# Altium PCB Power_Board_DRV8323.PcbDoc
Units mil, origin at the board's own origin, x right, y up, seen from the top; angles counter-clockwise.
Board outline 2748.03 x 2216.54 mil, 2 copper layers (Top Layer, Bottom Layer); 86 components, 59 nets, 316 pads, 0 vias.
Unrouted connection lines stored in the file: 118.
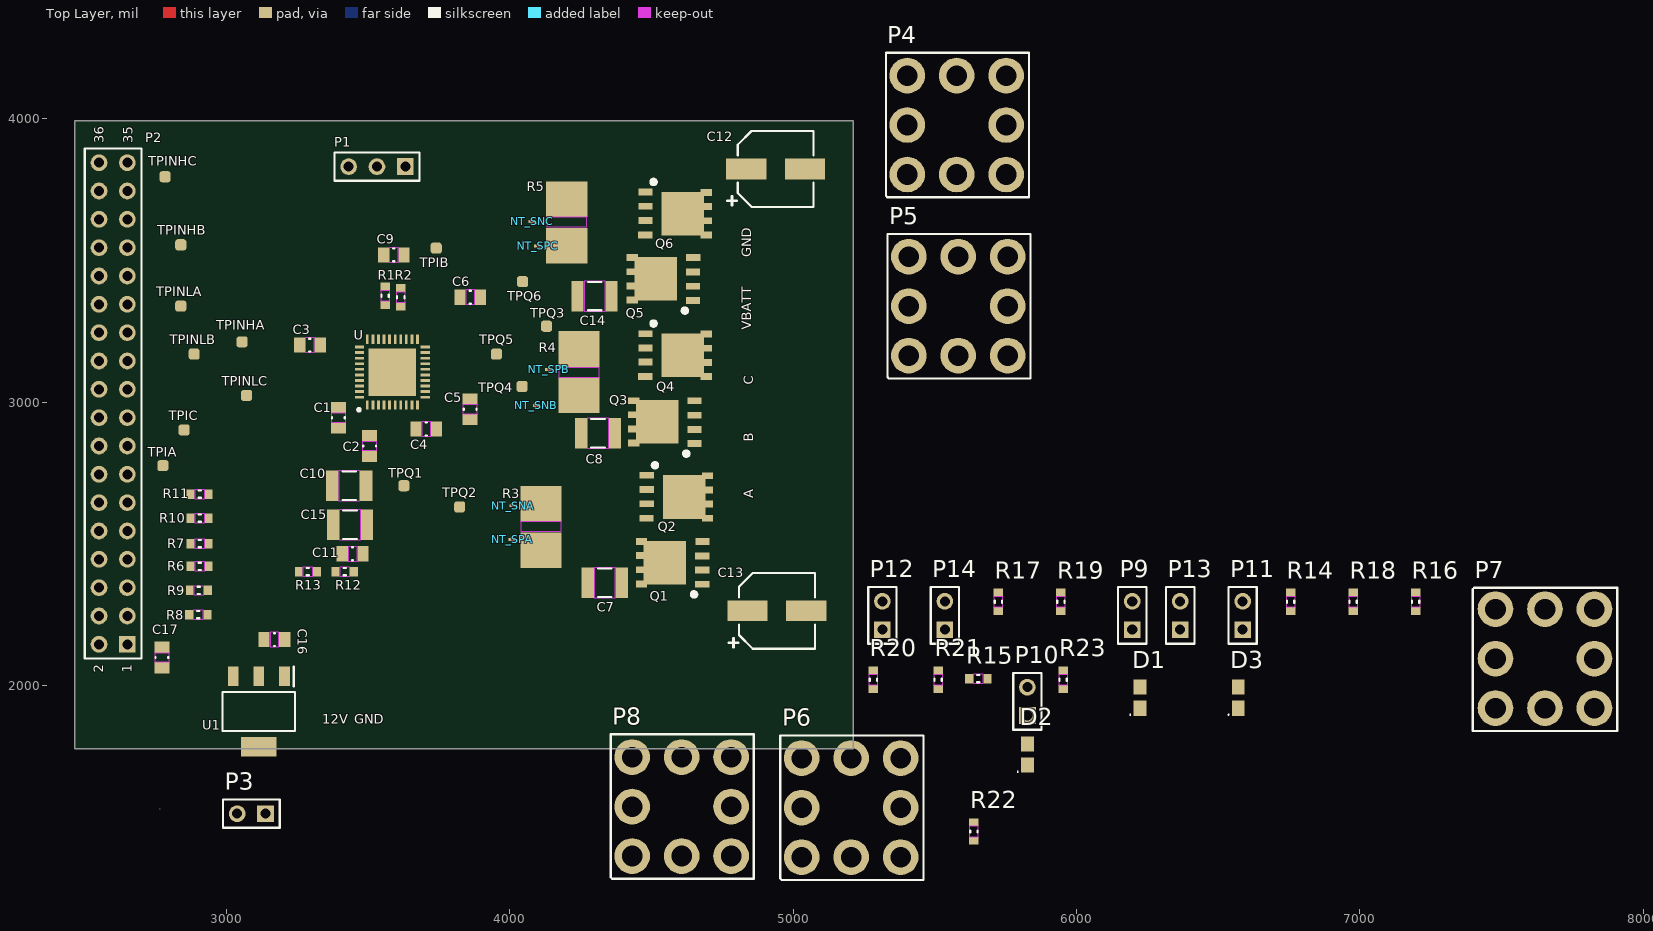
[diagram p0: Top Layer view]
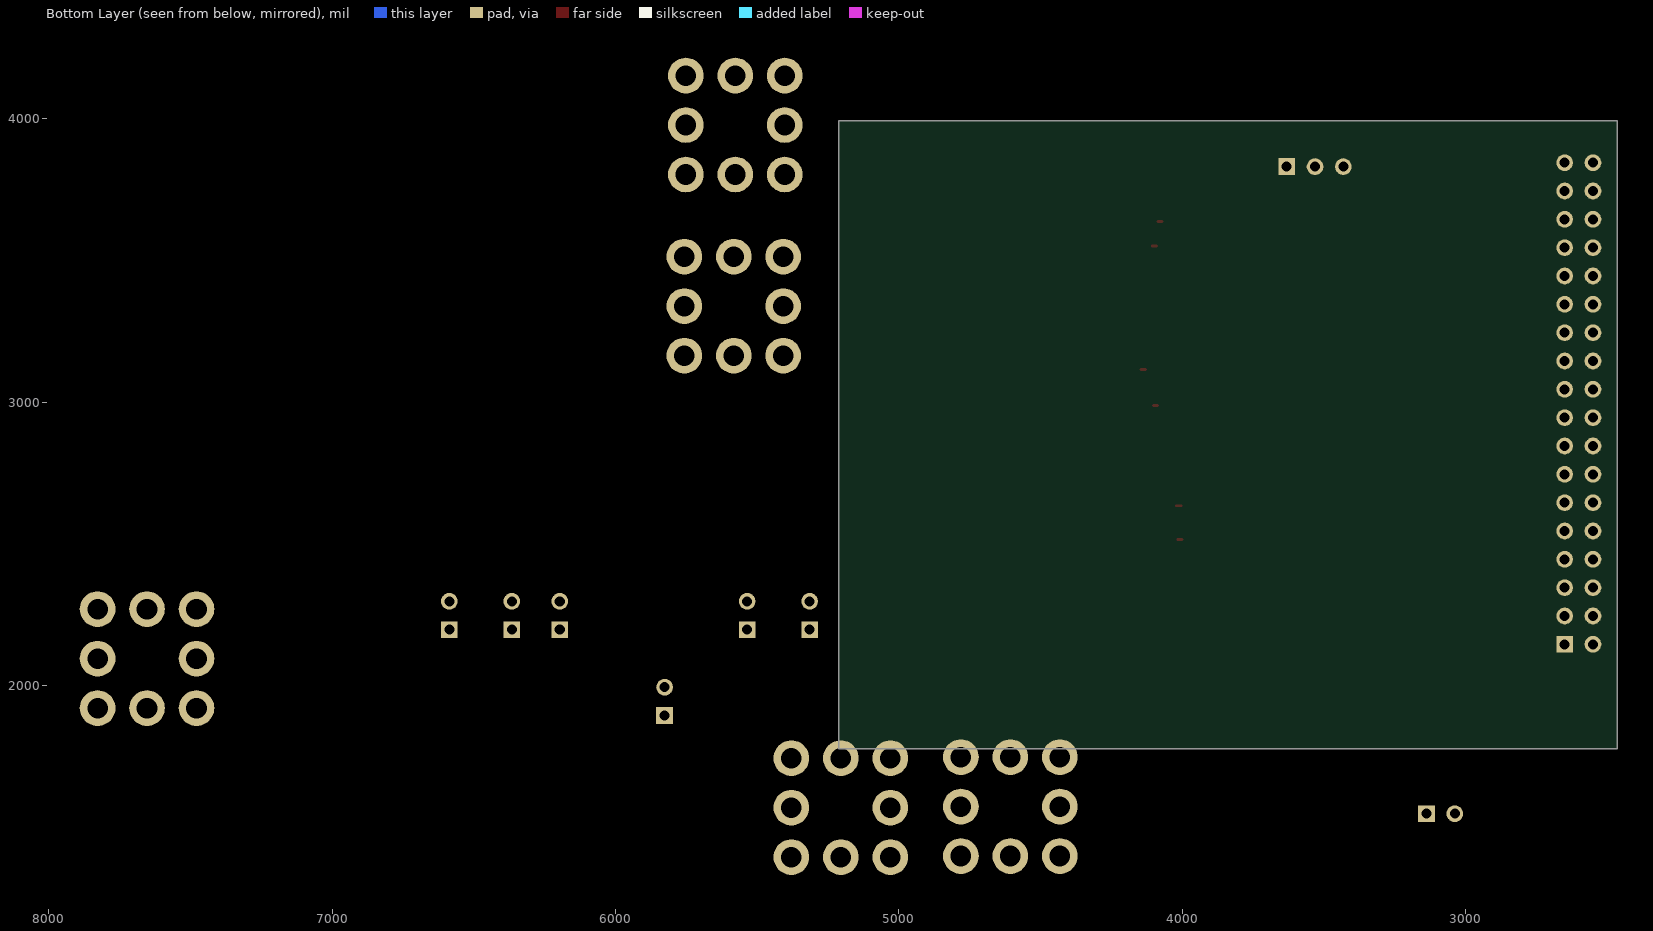
[diagram p1: Bottom Layer view, seen from below]

## Layer stack, top to bottom
Top Solder: solder mask 0.4, Solder Resist, Dk 3.5
Top Layer: signal copper 1.4
Dielectric 1: dielectric 12.6, FR-4, Dk 4.8
Bottom Layer: signal copper 1.4
Bottom Solder: solder mask 0.4, Solder Resist, Dk 3.5

## Board outline
2464.57,1775.59 2464.57,3992.13 5212.6,3992.13 5212.6,1775.59

## Design rules (kind name [scope] priority, off if disabled: settings)
Clearance [All] p1: gap=10 ignorepadtopadclearanceinfootprint=FALSE except(0: Arc-Hole Track-Hole SMDPad-Hole THPad-Hole Via-Hole Fill-Hole Poly-Hole Region-Hole Text-Hole; 5: Arc-Arc Arc-Track Track-Track SMDPad-SMDPad; 7.87: Arc-SMDPad Track-SMDPad SMDPad-Fill SMDPad-Poly SMDPad-Region)
PolygonConnect PolygonConnect_12 [All vs IsNamedPolygon('GND_L01_P197')] p1: connectstyle=Direct reliefconductorwidth=10 reliefentries=4 polygonreliefangle="90 Angle" airgapwidth=10
PolygonConnect PolygonConnect_11 [All vs IsNamedPolygon('GND_L02_P186')] p2: connectstyle=Direct reliefconductorwidth=10 reliefentries=4 polygonreliefangle="90 Angle" airgapwidth=10
PolygonConnect PolygonConnect_10 [All vs IsNamedPolygon('Bottom Layer-GND')] p3: connectstyle=Direct reliefconductorwidth=10 reliefentries=4 polygonreliefangle="90 Angle" airgapwidth=10
PolygonConnect PolygonConnect_9 [All vs IsNamedPolygon('VBATT_L02_P184')] p4: connectstyle=Direct reliefconductorwidth=10 reliefentries=4 polygonreliefangle="90 Angle" airgapwidth=10
PolygonConnect PolygonConnect_8 [All vs IsNamedPolygon('GND_L02_P183')] p5: connectstyle=Direct reliefconductorwidth=10 reliefentries=4 polygonreliefangle="90 Angle" airgapwidth=10
PolygonConnect PolygonConnect_7 [All vs IsNamedPolygon('GND_L01_P180')] p6: connectstyle=Direct reliefconductorwidth=10 reliefentries=4 polygonreliefangle="90 Angle" airgapwidth=10
PolygonConnect PolygonConnect_6 [All vs IsNamedPolygon('GND_L02_P181')] p7: connectstyle=Direct reliefconductorwidth=10 reliefentries=4 polygonreliefangle="90 Angle" airgapwidth=10
PolygonConnect PolygonConnect_5 [All vs IsNamedPolygon('NETNT_SPA_2_L02_P179')] p8: connectstyle=Direct reliefconductorwidth=10 reliefentries=4 polygonreliefangle="90 Angle" airgapwidth=10
PolygonConnect PolygonConnect_4 [All vs IsNamedPolygon('GND_L02_P177')] p9: connectstyle=Direct reliefconductorwidth=10 reliefentries=4 polygonreliefangle="90 Angle" airgapwidth=10
PolygonConnect PolygonConnect_3 [All vs IsNamedPolygon('NETNT_SPA_2_L01_P178')] p10: connectstyle=Direct reliefconductorwidth=10 reliefentries=4 polygonreliefangle="90 Angle" airgapwidth=10
PolygonConnect PolygonConnect_2 [All vs IsNamedPolygon('VBATT_L01_P178')] p11: connectstyle=Direct reliefconductorwidth=10 reliefentries=4 polygonreliefangle="90 Angle" airgapwidth=10
PolygonConnect PolygonConnect_1 [All vs IsNamedPolygon('3V3_L01_P174') Or IsNamedPolygon('GND_L01_P151') Or IsNamedPolygon('GND_L01_P155') Or IsNamedPolygon('GND_L01_P159') Or IsNamedPolygon('GND_L01_P163') Or IsNamedPolygon('GND_L01_P173') Or IsNamedPolygon('NETNT_SPA_2_L01_P156') Or IsNamedPolygon('NETNT_SPB_2_L01_P152') Or IsNamedPolygon('NETNT_SPC_2_L01_P148') Or IsNamedPolygon('PHASE_A_L01_P157') Or IsNamedPolygon('PHASE_B_L01_P153') Or IsNamedPolygon('PHASE_C_L01_P149') Or IsNamedPolygon('SPB_L01_P113') Or IsNamedPolygon('Top Layer-GND') Or IsNamedPolygon('Top Layer-GND 1') Or IsNamedPolygon('Top Layer-VBATT') Or IsNamedPolygon('Top Layer-VBATT 1') Or IsNamedPolygon('VBATT_L01_P150') Or IsNamedPolygon('VBATT_L01_P154') Or IsNamedPolygon('VBATT_L01_P162') Or IsNamedPolygon('VBATT_L01_P172') Or IsNamedPolygon('GND_L02_P177') Or IsNamedPolygon('VBATT_L02_P176')] p12: connectstyle=Direct reliefconductorwidth=10 reliefentries=4 polygonreliefangle="90 Angle" airgapwidth=10
PolygonConnect [All] p13: connectstyle=Relief reliefconductorwidth=10 reliefentries=4 polygonreliefangle="90 Angle" airgapwidth=10
RoutingVias [All] p1: holewidth=19.68 width=39.37 viastyle="Through Hole" minholewidth=7.87 minwidth=23.62 maxholewidth=28 maxwidth=50
SilkToSolderMaskClearance [IsPad] p1: minsilkscreentomaskgap=5.91 clearancetoexposedcopper=TRUE
SolderMaskExpansion [All] p1: expansion=4 istentingtop=FALSE
Width [All] p1: maxlimit=15 minlimit=10 preferedwidth=15 toplayer_prefwidth=10 minimp=50.000000 maximp=50.000000 favimp=50.000000
29 further rules are at their usual default settings.

## Classes and differential pairs
component class Power_Board_Components: C7 C8 C9 C10 C11 C12 C13 C14 C15 D1 D2 D3 P1 P3 P4 P5 P6 P7 P8 P9 P10 P11 P12 P13 P14 R14 R15 R16 R17 R18 R19 R20 R21 R22 R23
component class Power_Board_DRV8323: C1 C2 C3 C4 C5 C6 C16 C17 NT_SNA NT_SNB NT_SNC NT_SPA NT_SPB NT_SPC P2 Q1 Q2 Q3 Q4 Q5 Q6 R1 R2 R3 R4 R5 R6 R7 R8 R9 R10 R11 R12 R13 TPIA TPIB TPIC TPINHA TPINHB TPINHC TPINLA TPINLB TPINLC TPQ1 TPQ2 TPQ3 TPQ4 TPQ5 TPQ6 U U1

## Components (designator, comment, footprint, x,y, rotation, side; value= is the part's Value field where it differs from the comment)
C1 "Capacitor - Nonpolarized" "0805 - CAPACITOR"#1 3395,2945 r90 top value=47nF
C2 "Capacitor - Nonpolarized" "0805 - CAPACITOR"#1 3505,2845 r270 top value=1uF
C3 "Capacitor - Nonpolarized" "0805 - CAPACITOR"#1 3294.29,3200.79 r0 top value=1uF
C4 "Capacitor - Nonpolarized" "0805 - CAPACITOR"#1 3705,2905 r180 top value=1nF
C5 "Capacitor - Nonpolarized" "0805 - CAPACITOR"#1 3860,2975 r90 top value=1nF
C6 "Capacitor - Nonpolarized" "0805 - CAPACITOR"#1 3860,3370 r0 top value=1nF
C7 "Capacitor - Nonpolarized" "1210 - Capacitor"#1 4334.65,2362.2 r180 top value=4.7uF
C8 "Capacitor - Nonpolarized" "1210 - Capacitor"#2 4311.02,2889.76 r180 top value=4.7uF
C9 "Capacitor - Nonpolarized" "0805 - CAPACITOR"#1 3590.55,3519.68 r180 top value=0.1uF
C10 "Capacitor - Nonpolarized" "1210 - Capacitor"#1 3433.07,2704.72 r0 top value=4.7uF
C11 "Capacitor - Nonpolarized" "0805 - CAPACITOR"#2 3444.88,2464.57 r0 top value=0.1uF
C12 "Capacitor - Polarized" "OCVZ0606 - CAPACITOR" 4937.99,3822.83 r0 top value=330uF
C13 "Capacitor - Polarized" "OCVZ0606 - CAPACITOR" 4942.82,2262.85 r0 top value=330uF
C14 "Capacitor - Nonpolarized" "1210 - Capacitor"#1 4299.21,3374.02 r180 top value=4.7uF
C15 "Capacitor - Nonpolarized" "1210 - Capacitor"#1 3436.02,2566.93 r180 top value=4.7uF
C16 "Capacitor - Nonpolarized" "0805 - Capacitor" 3169.29,2161.42 r0 top value=1uF
C17 "Capacitor - Nonpolarized" "0805 - Capacitor" 2771.65,2098.43 r90 top value=1uF
D1 "Diode" "0805 - DIODE" 6224.4,1956.69 r90 top value=2.2V
D2 "Diode" "0805 - DIODE" 5826.77,1755.91 r90 top value=3.3V
D3 "Diode" "0805 - DIODE" 6570.85,1956.69 r90 top value=3.3V
NT_SNA "NetTie" "Net Tie" 4004.68,2633.86 r90 top net-tie
NT_SNB "NetTie" "NET TIE" 4086.61,2988.19 r90 top net-tie
NT_SNC "NetTie" "NET TIE" 4070.87,3637.8 r90 top net-tie
NT_SPA "NetTie" "NET TIE" 4000.72,2515.03 r90 top net-tie
NT_SPB "NetTie" "Net Tie" 4130,3115 r90 top net-tie
NT_SPC "NetTie" "Net Tie" 4090.55,3551.18 r90 top net-tie
P1 "1x3 Header" HDR1X3 3631.06,3831.06 r180 top
P2 "Header 18X2" HDR2X18 2650,2145 r90 top
P3 "1x2 Header" HDR1X2 3137.8,1547.24 r180 top
P4 "74650094R" 74650094R 5577.36,3977.76 r90 top
P5 "74650094R" 74650094R 5582.68,3338.58 r90 top
P6 "74650094R" 74650094R 5204.72,1568.31 r90 top
P7 "74650094R" 74650094R 7653.53,2094.48 r0 top
P8 "74650094R" 74650094R 4606.3,1572.24 r90 top
P9 "NTC Thermisters" HDR1X2 6196.84,2196.85 r90 top
P10 "NTC Thermisters" HDR1X2 5826.76,1893.7 r90 top
P11 "NTC Thermisters" HDR1X2 6586.6,2196.85 r90 top
P12 "NTC Thermisters" HDR1X2 5314.95,2196.85 r90 top
P13 "NTC Thermisters" HDR1X2 6366.13,2196.85 r90 top
P14 "NTC Thermisters" HDR1X2 5535.42,2196.85 r90 top
Q1 "MOSFET-N" "POWERPAK® SO-8" 4679.72,2508.27 r180 top
Q2 "MOSFET-N" "POWERPAK® SO-8" 4482.72,2590 r0 top
Q3 "MOSFET-N" "POWERPAK® SO-8" 4652.28,3005 r180 top
Q4 "MOSFET-N" "POWERPAK® SO-8" 4477.72,3090 r0 top
Q5 "MOSFET-N" "POWERPAK® SO-8" 4647.28,3510 r180 top
Q6 "MOSFET-N" "POWERPAK® SO-8" 4477.72,3590 r0 top
R1 "Resistor" "0603 - RESISTOR" 3560,3375 r90 top value=4.7k
R2 "Resistor" "0603 - RESISTOR" 3615,3370 r90 top value=4.7k
R3 "Resistor" "2512 - RESISTOR" 4110.24,2559.06 r270 top value=1m
R4 "Resistor" "2512 - RESISTOR" 4244.09,3105.31 r90 top value=1m
R5 "Resistor" "2512 - RESISTOR" 4200.79,3633.86 r270 top value=1m
R6 "Resistor" "0603 - RESISTOR" 2905,2420 r180 top value=91k
R7 "Resistor" "0603 - RESISTOR" 2905,2500 r0 top value=5.6k
R8 "Resistor" "0603 - RESISTOR" 2900,2250 r180 top value=91k
R9 "Resistor" "0603 - RESISTOR" 2902.52,2335 r0 top value=5.6k
R10 "Resistor" "0603 - RESISTOR" 2905,2590 r180 top value=91k
R11 "Resistor" "0603 - RESISTOR" 2905,2675 r0 top value=5.6k
R12 "Resistor" "0603 - RESISTOR" 3417.32,2401.57 r180 top value=91k
R13 "Resistor" "0603 - RESISTOR" 3287.4,2401.57 r180 top value=5.6k
R14 "Resistor" "0603 - Resistor" 6755.89,2295.27 r90 top value=10k
R15 "Resistor" "0603 - Resistor" 5653.53,2023.62 r0 top value=10k
R16 "Resistor" "0603 - Resistor" 7196.84,2295.27 r90 top value=10k
R17 "Resistor" "0603 - Resistor" 5724.4,2295.27 r90 top value=10k
R18 "Resistor" "0603 - Resistor" 6976.36,2295.27 r90 top value=10k
R19 "Resistor" "0603 - Resistor" 5944.87,2295.27 r90 top value=10k
R20 "Resistor" "0603 - Resistor" 5283.45,2019.68 r90 top
R21 "Resistor" "0603 - Resistor" 5511.8,2019.68 r90 top value=1k
R22 "Resistor" "0603 - Resistor" 5637.8,1484.25 r90 top value=1k
R23 "Resistor" "0603 - Resistor" 5952.74,2019.68 r90 top value=1k
TPIA "Test Point" "Test Point"#1 2775.59,2775.59 r90 top
TPIB "Test Point" "Test Point"#1 3740.16,3543.31 r90 top
TPIC "Test Point" "Test Point"#1 2850.39,2901.57 r90 top
TPINHA "Test Point" "Test Point"#1 3055.12,3212.6 r90 top
TPINHB "Test Point" "Test Point"#1 2838.58,3555.12 r90 top
TPINHC "Test Point" "Test Point"#2 2783.46,3809.72 r90 top
TPINLA "Test Point" "Test Point"#1 2838.58,3338.58 r90 top
TPINLB "Test Point" "Test Point"#1 2885.83,3169.29 r90 top
TPINLC "Test Point" "Test Point"#1 3070.87,3023.62 r90 top
TPQ1 "Test Point" "Test Point"#1 3625.98,2704.72 r90 top
TPQ2 "Test Point" "Test Point"#1 3822.83,2629.92 r90 top
TPQ3 "Test Point" "Test Point"#1 4129.92,3267.72 r90 top
TPQ4 "Test Point" "Test Point"#1 4043.31,3055.12 r90 top
TPQ5 "Test Point" "Test Point"#1 3952.76,3169.29 r90 top
TPQ6 "Test Point" "Test Point"#1 4045,3425 r90 top
U "DRV8323SRTAT" DRV8323SRTAT 3585.55,3105.79 r90 top
U1 "MCP1755ST" TLV1117 3114.17,1907.48 r270 top

## Footprints (in the part's own frame and the unit in brackets; to place one, negate y for a bottom-side part, rotate by r counter-clockwise, add the part's x,y. Pads: shape width x height; smd on the part's side, far side on the other; paste and mask are expansions set on the pad)
"0603 - RESISTOR" [mm] "0603 Chip Resistor - IPC Medium Density"
  rect 0.7x0.85 smd: 1(-0.825,0) 2(0.825,0)
  Top Layer keep-out region: -0.45,0.4 -0.45,-0.4 0.45,-0.4 0.45,0.4
  silkscreen extent -0.1,-0.33 0.1,0.33, body extent -0.8,-0.4 0.8,0.4, height 0.45
"0603 - Resistor" [mm] "0603 Chip Resistor - IPC Medium Density"
  rect 0.7x0.85 smd: 1(-0.825,0) 2(0.825,0)
  Top Layer keep-out region: -0.45,0.4 -0.45,-0.4 0.45,-0.4 0.45,0.4
  silkscreen extent -0.1,-0.33 0.1,0.33, body extent -0.8,-0.4 0.8,0.4, height 0.45
"0805 - CAPACITOR"#1 [mm] "0805 Chip Capacitor - IPC Medium Density"
  rect 1x1.35 smd: 1(-0.925,0) 2(0.925,0)
  Top Layer keep-out region: -0.4,0.65 -0.4,-0.65 0.4,-0.65 0.4,0.65
  silkscreen extent -0.05,-0.58 0.05,0.58, body extent -1,-0.6 1,0.6, height 1.2
"0805 - CAPACITOR"#2 [mm] "0805 Chip Capacitor - IPC Medium Density"
  rect 1x1.35 smd: 2(0.925,0) ""(-0.925,0)
  Top Layer keep-out region: -0.4,0.65 -0.4,-0.65 0.4,-0.65 0.4,0.65
  silkscreen extent -0.05,-0.58 0.05,0.58, body extent -1,-0.6 1,0.6, height 1.2
"0805 - Capacitor" [mm] "0805 Chip Capacitor - IPC Medium Density"
  rect 1x1.35 smd: 1(-0.925,0) 2(0.925,0)
  Top Layer keep-out region: -0.4,0.65 -0.4,-0.65 0.4,-0.65 0.4,0.65
  silkscreen extent -0.05,-0.58 0.05,0.58, body extent -1,-0.6 1,0.6, height 1.2
"0805 - DIODE" [mm] "Diode"
  rect 1.35x1.15 smd: 1(-0.948,-0.009) 2(0.952,-0.009)
  silkscreen extent -1.57,0.82 -1.47,0.92, body extent -1.29,-0.71 1.3,0.69, height 1.2
"1210 - Capacitor"#1 [mm] "1210 Chip Capacitor - IPC Medium Density"
  rect 1.1x2.75 smd: 1(-1.525,0) 2(1.525,0)
  Top Layer keep-out region: -0.95,1.35 -0.95,-1.35 0.95,-1.35 0.95,1.35
  silkscreen extent -0.6,-1.27 0.6,1.28, body extent -1.65,-1.3 1.65,1.3, height 1.6
"1210 - Capacitor"#2 [mm] "1210 Chip Capacitor - IPC Medium Density"
  rect 1.1x2.75 smd: 2(1.525,0) ""(-1.525,0)
  Top Layer keep-out region: -0.95,1.35 -0.95,-1.35 0.95,-1.35 0.95,1.35
  silkscreen extent -0.6,-1.27 0.6,1.28, body extent -1.65,-1.3 1.65,1.3, height 1.6
"2512 - RESISTOR" [mm]
  rect 3.2x3.7 smd: 1(-2.075,0) 2(2.075,0)
  Top Layer keep-out region: -0.45,1.8 -0.45,-1.8 0.4,-1.8 0.4,1.8
  body extent -3.15,-1.6 3.15,1.6, height 0.6
74650094R [mm] "M4 High Current Terminal Block"
  round 3.2 hole 1.85: 1(-4.435,-4.435) 1(-4.435,0) 1(-4.435,4.435) 1(0,4.435) 1(0,-4.435) 1(4.435,-4.435) 1(4.435,0) 1(4.435,4.435)
  round 1.524 hole 4 unplated: 18(0,0)
  silkscreen extent -6.48,-6.48 6.48,6.35, body extent -5,-5 5,5, height 3
DRV8323SRTAT [mm]
  rect 0.85x0.25 smd: 1(-2.95,2.25) 2(-2.95,1.75) 3(-2.95,1.25) 4(-2.95,0.75) 5(-2.95,0.25) 6(-2.95,-0.25) 7(-2.95,-0.75) 8(-2.95,-1.25) 9(-2.95,-1.75) 10(-2.95,-2.25) 21(2.95,-2.25) 22(2.95,-1.75) 23(2.95,-1.25) 24(2.95,-0.75) 25(2.95,-0.25) 26(2.95,0.25) 27(2.95,0.75) 28(2.95,1.25) 29(2.95,1.75) 30(2.95,2.25)
  rect 0.25x0.85 smd: 11(-2.25,-2.95) 12(-1.75,-2.95) 13(-1.25,-2.95) 14(-0.75,-2.95) 15(-0.25,-2.95) 16(0.25,-2.95) 17(0.75,-2.95) 18(1.25,-2.95) 19(1.75,-2.95) 20(2.25,-2.95) 31(2.25,2.95) 32(1.75,2.95) 33(1.25,2.95) 34(0.75,2.95) 35(0.25,2.95) 36(-0.25,2.95) 37(-0.75,2.95) 38(-1.25,2.95) 39(-1.75,2.95) 40(-2.25,2.95)
  rect 4.25x4.25 smd: 41(0,0)
  silkscreen extent -3.5,2.87 -3.25,3.12, body extent -3.05,-3.05 3.05,3.05, height 0.8
HDR1X2 [mm] "Connector; Header; 2 Position"
  rect 1.5x1.5 hole 0.9: 1(0,0)
  round 1.5 hole 0.9: 2(2.54,0)
  silkscreen extent -1.27,-1.27 3.81,1.27, body extent -1.27,-1.27 3.81,1.27, height 8.54
HDR1X3 [mm] "Connector; Header; 3 Position"
  rect 1.5x1.5 hole 0.9: 1(0,0)
  round 1.5 hole 0.9: 2(2.54,0) 3(5.08,0)
  silkscreen extent -1.27,-1.27 6.35,1.27, body extent -1.27,-1.27 6.35,1.27, height 8.54
HDR2X18 [mm] "Connector; Header; 18x2 Position"
  rect 1.5x1.5 hole 0.9: 1(0,0)
  round 1.5 hole 0.9: 2(0,2.54) 3(2.54,0) 4(2.54,2.54) 5(5.08,0) 6(5.08,2.54) 7(7.62,0) 8(7.62,2.54) 9(10.16,0) 10(10.16,2.54) 11(12.7,0) 12(12.7,2.54) 13(15.24,0) 14(15.24,2.54) 15(17.78,0) 16(17.78,2.54) 17(20.32,0) 18(20.32,2.54) 19(22.86,0) 20(22.86,2.54) 21(25.4,0) 22(25.4,2.54) 23(27.94,0) 24(27.94,2.54) 25(30.48,0) 26(30.48,2.54) 27(33.02,0) 28(33.02,2.54) 29(35.56,0) 30(35.56,2.54) 31(38.1,0) 32(38.1,2.54) 33(40.64,0) 34(40.64,2.54) 35(43.18,0) 36(43.18,2.54)
  silkscreen extent -1.27,-1.27 44.45,3.81
"Net Tie" [mil] "General Net TIe"
  rect 10x10 smd mask+0: 1(0,0) 2(0,-15)
  Top Layer lines w10: 0,0 0,-15
"NET TIE" [mil] "General Net TIe"
  rect 10x10 smd mask+0: 1(0,0) 2(0,-15)
  Top Layer lines w10: 0,0 0,-15
"OCVZ0606 - CAPACITOR" [mm] "Aluminum Electrolytic Capacitor, Body 6.60x6.60x6.00mm, IPC Low Density"
  rect 3.6x1.85 smd: 1(-2.625,0) 2(2.625,0)
  silkscreen extent -4.3,-3.4 3.4,3.4, body extent -3.6,-3.4 3.6,3.4, height 6
"POWERPAK® SO-8" [mm]
  rect 1.27x0.61 smd: 1(0,0) 3(0.017,3.845) 3(0.017,2.575) 3(0.017,1.305)
  rect 3.81x3.91 smd: 2(3.36,1.905)
  rect 1.02x0.61 smd: 2(5.465,3.81) 2(5.465,0) 2(5.465,0) 2(5.465,1.27) 2(5.465,2.54)
  silkscreen extent 0.57,4.57 0.93,4.93
"Test Point"#1 [mm] "Test Point"
  rrect50% 1x1 smd: 1(0,0)
"Test Point"#2 [mm] "Test Point"
  rrect50% 1x1 smd: 1(-0.367,0)
TLV1117 [mm] "SOT230P700X180-4N"
  rect 1.75x0.95 smd: 1(-3.15,2.3) 2(-3.15,0) 3(-3.15,-2.3)
  rect 1.75x3.2 smd: 2(3.15,0)
  silkscreen extent -4.03,-3.25 1.75,3.25, body extent -3.5,-3.25 3.5,3.25, height 1.8

## Part data
C1: "Nonpolarized Capacitor", Manufacturer=YAGEO, Manufacturer Part Number=CC0805KKX7R0BB473, Rating=100V, Supplier Part Number=311-1876-1-ND, Supplier=Digikey
C2 C3: "Nonpolarized Capacitor", Manufacturer=YAGEO, Manufacturer Part Number=CC0805KKX7R7BB105, Rating=16V, Supplier Part Number=311-1365-1-ND, Supplier=Digikey
C4 C5 C6: "Nonpolarized Capacitor", Manufacturer=YAGEO, Manufacturer Part Number=CC0805KRX7R0BB102, Rating=100V, Supplier Part Number=311-1472-1-ND, Supplier=Digikey
C7 C8 C10 C14 C15: "Nonpolarized Capacitor", Manufacturer="Holy Stone Enterprise Co., Ltd.", Manufacturer Part Number=C1210X475K101T, Rating=100V, Supplier Part Number=2873-C1210X475K101TCT-ND, Supplier=Digikey
C9 C11: "Nonpolarized Capacitor", Manufacturer="Samsung Electro-Mechanics", Manufacturer Part Number=CL21B104KCFWPNE, Rating=100V, Supplier Part Number=1276-6733-1-ND, Supplier=Digikey
C12 C13: "Polarized Capacitor", Manufacturer="Panasonic Electronic Components", Manufacturer Part Number=EEE-FK2A331AM, Rating=100V, Supplier Part Number=PCE4867CT-ND, Supplier=Digikey
C16 C17: "Nonpolarized Capacitor"
D1: Manufacturer=SunLED, Manufacturer Part Number=XZM2CRK54WRP-1, Supplier Part Number=1497-XZM2CRK54WRP-1CT-ND, Supplier=Digikey
D2 D3: Manufacturer=SunLED, Manufacturer Part Number=XZDGK54W-8, Supplier Part Number=1497-1435-1-ND, Supplier=Digkey
NT_SNA NT_SNB NT_SNC NT_SPA NT_SPB NT_SPC: library part "Net Tie"
P1: "1x3 Pin Header"
P2: "Header, 18-Pin, Dual row", LatestRevisionDate=17-Jul-2002, LatestRevisionNote="Re-released for DXP Platform.", Publisher="Altium Limited"
P3: "1x2 Pin Header"
P4 P5 P6 P7 P8: Manufacturer=Wurth, Supplier Part Number=732-10884-1-ND, Manufacturer Part Number=74650094R, Supplier=Digikey
P9 P10 P11 P12 P13 P14: library part "Header 2", "Header, 2-Pin", LatestRevisionDate=17-Jul-2002, LatestRevisionNote="Re-released for DXP Platform.", Publisher="Altium Limited"
Q1 Q2 Q3 Q4 Q5 Q6: "N-Channel MOSFET", Rating=100V, Supplier Part Number=SiR846DP
R1 R2: Manufacturer=YAGEO, Manufacturer Part Number=RC0603FR-074K7L, Supplier Part Number=311-4.70KHRCT-ND, Supplier=Digikey
R3 R4 R5: Manufacturer=Riedon, Manufacturer Part Number=CSR2512C0R001F, Rating=3W, Supplier Part Number=696-1185-1-ND, Tolerance=1%, Supplier=Digikey
R6 R8 R10 R12: Manufacturer=YAGEO, Manufacturer Part Number=RC0603FR-0791KL, Supplier Part Number=311-91.0KHRCT-ND, Tolerance=1%, Supplier=Digikey
R7 R9 R11 R13: Manufacturer=YAGEO, Manufacturer Part Number=RC0603FR-075K6L, Supplier Part Number=311-5.60KHRCT-ND, Tolerance=1%, Supplier=Digikey
R20: Rating=100V
U: "Multiphase Motor Driver Power MOSFET SPI", Manufacturer="Texas Instruments", Supplier Part Number=296-47095-1-ND, ComponentLink1Description=Datasheet, ComponentLink1URL=https://www.ti.com/lit/ds/symlink/drv8323.pdf?HQS=dis-dk-null-digikeymode-dsf-pf-null-wwe&ts=1623708117864, Manufacturer Part Number=DRV8323SRTAT, Supplier=Digikey

## Nets (pads, with @x,y where several pads share a name; then routed paths per layer and width w, separated by ;. In a path a pad name is that pad's centre, name@x,y a point inside that pad or via, vN(x,y) a via of type N, cw(c..) or ccw(c..) an arc to the next point about the centre after c; other vN are vias at no path point)
3V3: C9.1 P1.1 R1.2 R2.2 R14.2 R15.2 R16.2 R17.2 R18.2 R19.2 U.24
5V: C17.2 P2.1 U1.3
12V: C16.2 P3.2 U1.1
ADC_MHA: P2.24 P9.1
ADC_MHB: P2.21 P13.1
ADC_MHC: P2.29 P11.1
ADC_MLA: P2.26 P10.1
ADC_MLB: P2.25 P12.1
ADC_MLC: P2.35 P14.1
CAL: P1.2 U.31
CS_DRIVER: P2.10 U.29
DVDD: C3.2 R22.1 U.33
EN: P2.19 R23.1 U.30
GHA: Q1.1 TPQ1.1 U.6
GHB: Q3.1 TPQ3.1 U.15
GHC: Q5.1 TPQ5.1 U.16
GLA: Q2.1 TPQ2.1 U.8
GLB: Q4.1 TPQ4.1 U.13
GLC: Q6.1 TPQ6.1 U.18
GND: C3.1 C7.2 C8.2 C9.2 C12.2 C13.2 C14.2 C15.2 C16.1 C17.1 D1.2 D2.2 D3.2 NT_SNA.2 NT_SNB.2 NT_SNC.2 P1.3 P2.3 P3.1 P5.1 P9.2 P10.2 P11.2 P12.2 P13.2 P14.2 R3.1 R4.1 R5.1 R7.2 R9.2 R11.2 R13.2 R20.1 U1.2
INHA: P2.32 TPINHA.1 U.34
INHB: P2.34 TPINHB.1 U.36
INHC: U.38
INLA: P2.28 TPINLA.1 U.35
INLB: U.37
INLC: P2.30 TPINLC.1 U.39
NetC1_1: C1.1 U.2
NetC1_2: C1.2 U.1
NetC2_1: C2.1 U.3
NetD1_1: D1.1 R21.2
NetD2_1: D2.1 R22.2
NetD3_1: D3.1 R23.2
NetNT_SPA_2: NT_SPA.2 Q2.3 R3.2
NetNT_SPB_2: NT_SPB.2 Q4.3 R4.2
NetNT_SPC_2: NT_SPC.2 Q6.3 R5.2
NetP2_27: P2.27 TPINLB.1
NetP2_36: P2.36 TPINHC.1
NetU_32: U.32 U.40 U.41
NFAULT: P2.2 R2.1 R21.1 U.25
PHASE_A: P6.1 Q1.3 Q2.2 R6.1 U.7
PHASE_B: P7.1 Q3.3 Q4.2 R8.1 U.14
PHASE_C: P8.1 Q5.3 Q6.2 R10.1 U.17
SCLK: P2.18 U.28
SDI: P2.17 U.27
SDO: P2.20 R1.1 U.26
SNA: C4.1 NT_SNA.1 U.10
SNB: C5.1 NT_SNB.1 U.11
SNC: C6.1 NT_SNC.1 U.20
SOA: P2.15 TPIA.1 U.23
SOB: P2.22 TPIB.1 U.22
SOC: P2.16 TPIC.1 U.21
SPA: C4.2 NT_SPA.1 U.9
SPB: C5.2 NT_SPB.1 U.12
SPC: C6.2 NT_SPC.1 U.19
VBATT: C2.2 C7.1 C10.2 C11.2 C12.1 C13.1 P4.1 Q1.2 Q3.2 Q5.2 R12.1 R20.2 U.4 U.5
VSENSE_A: P2.6 R6.2 R7.1
VSENSE_B: P2.4 R8.2 R9.1
VSENSE_C: P2.8 R10.2 R11.1
VSENSE_VBATT: P2.5 R12.2 R13.1
pads on no net: C8. C10.1 C11. C14.1 C15.1 P2.7 P2.9 P2.11 P2.12 P2.13 P2.14 P2.23 P2.31 P2.33 P4.18 P5.18 P6.18 P7.18 P8.18 R14.1 R15.1 R16.1 R17.1 R18.1 R19.1

## Polygon pours and split planes (outlines as drawn)
SPB on Top Layer "SPB_L01_P113" (solid, pour order 113): 2765,1565 2765,1563.69
no net on Layer0 "Default Coverlay 1 Top" (split plane): 2464.57,1775.59 2464.57,3992.13 5212.6,3992.13 5212.6,1775.59
no net on Layer0 "Default Coverlay 1 Bottom" (split plane): 2464.57,1775.59 2464.57,3992.13 5212.6,3992.13 5212.6,1775.59

## Silkscreen, mask and mechanical layers (free items; w line width, h text height)
Top Overlay:
  drawing of 22 lines, arcs and shapes, not listed
  text "2022-01-20" at 7198.98,5502.13 h60
  text "Test Rig Power Board Rev.2" at 6285.59,5396.14 h60
  text "GND" at 4851.77,3510.43 h32.99 r90
  text "VBATT" at 4851.77,3254.53 h32.99 r90
  text "C" at 4859.65,3061.61 h32.99 r90
  text "B" at 4859.65,2860.83 h32.99 r90
  text "A" at 4859.65,2660.04 h32.99 r90
  text "12V" at 3337.2,1864.76 h32.99
  text "GND" at 3451.38,1864.76 h32.99
Bottom Overlay:
  text "Ellen Wang" at 6371.89,5691.41 h60

## Text inside footprints (layer, text, board x,y; h text height)
P2: Top Overlay "2" at 2565,2045 h32.99 r90; Top Overlay "1" at 2665,2045 h32.99 r90; Top Overlay "35" at 2669.29,3913.39 h32.99 r90; Top Overlay "36" at 2566.93,3913.39 h32.99 r90